# Altium PCB MCU_FOR_DOWNLOAD_V6_8_PCS.PcbDoc (part 3 of 4)
Units mil, origin at the board's own origin, x right, y up, seen from the top; angles counter-clockwise.
Board outline 4834.06 x 3482.15 mil, 4 copper layers (Top, GND1, GND2, Bottom), stack 35.4 mil thick; 280 components, 38 nets, 1144 pads, 944 vias.
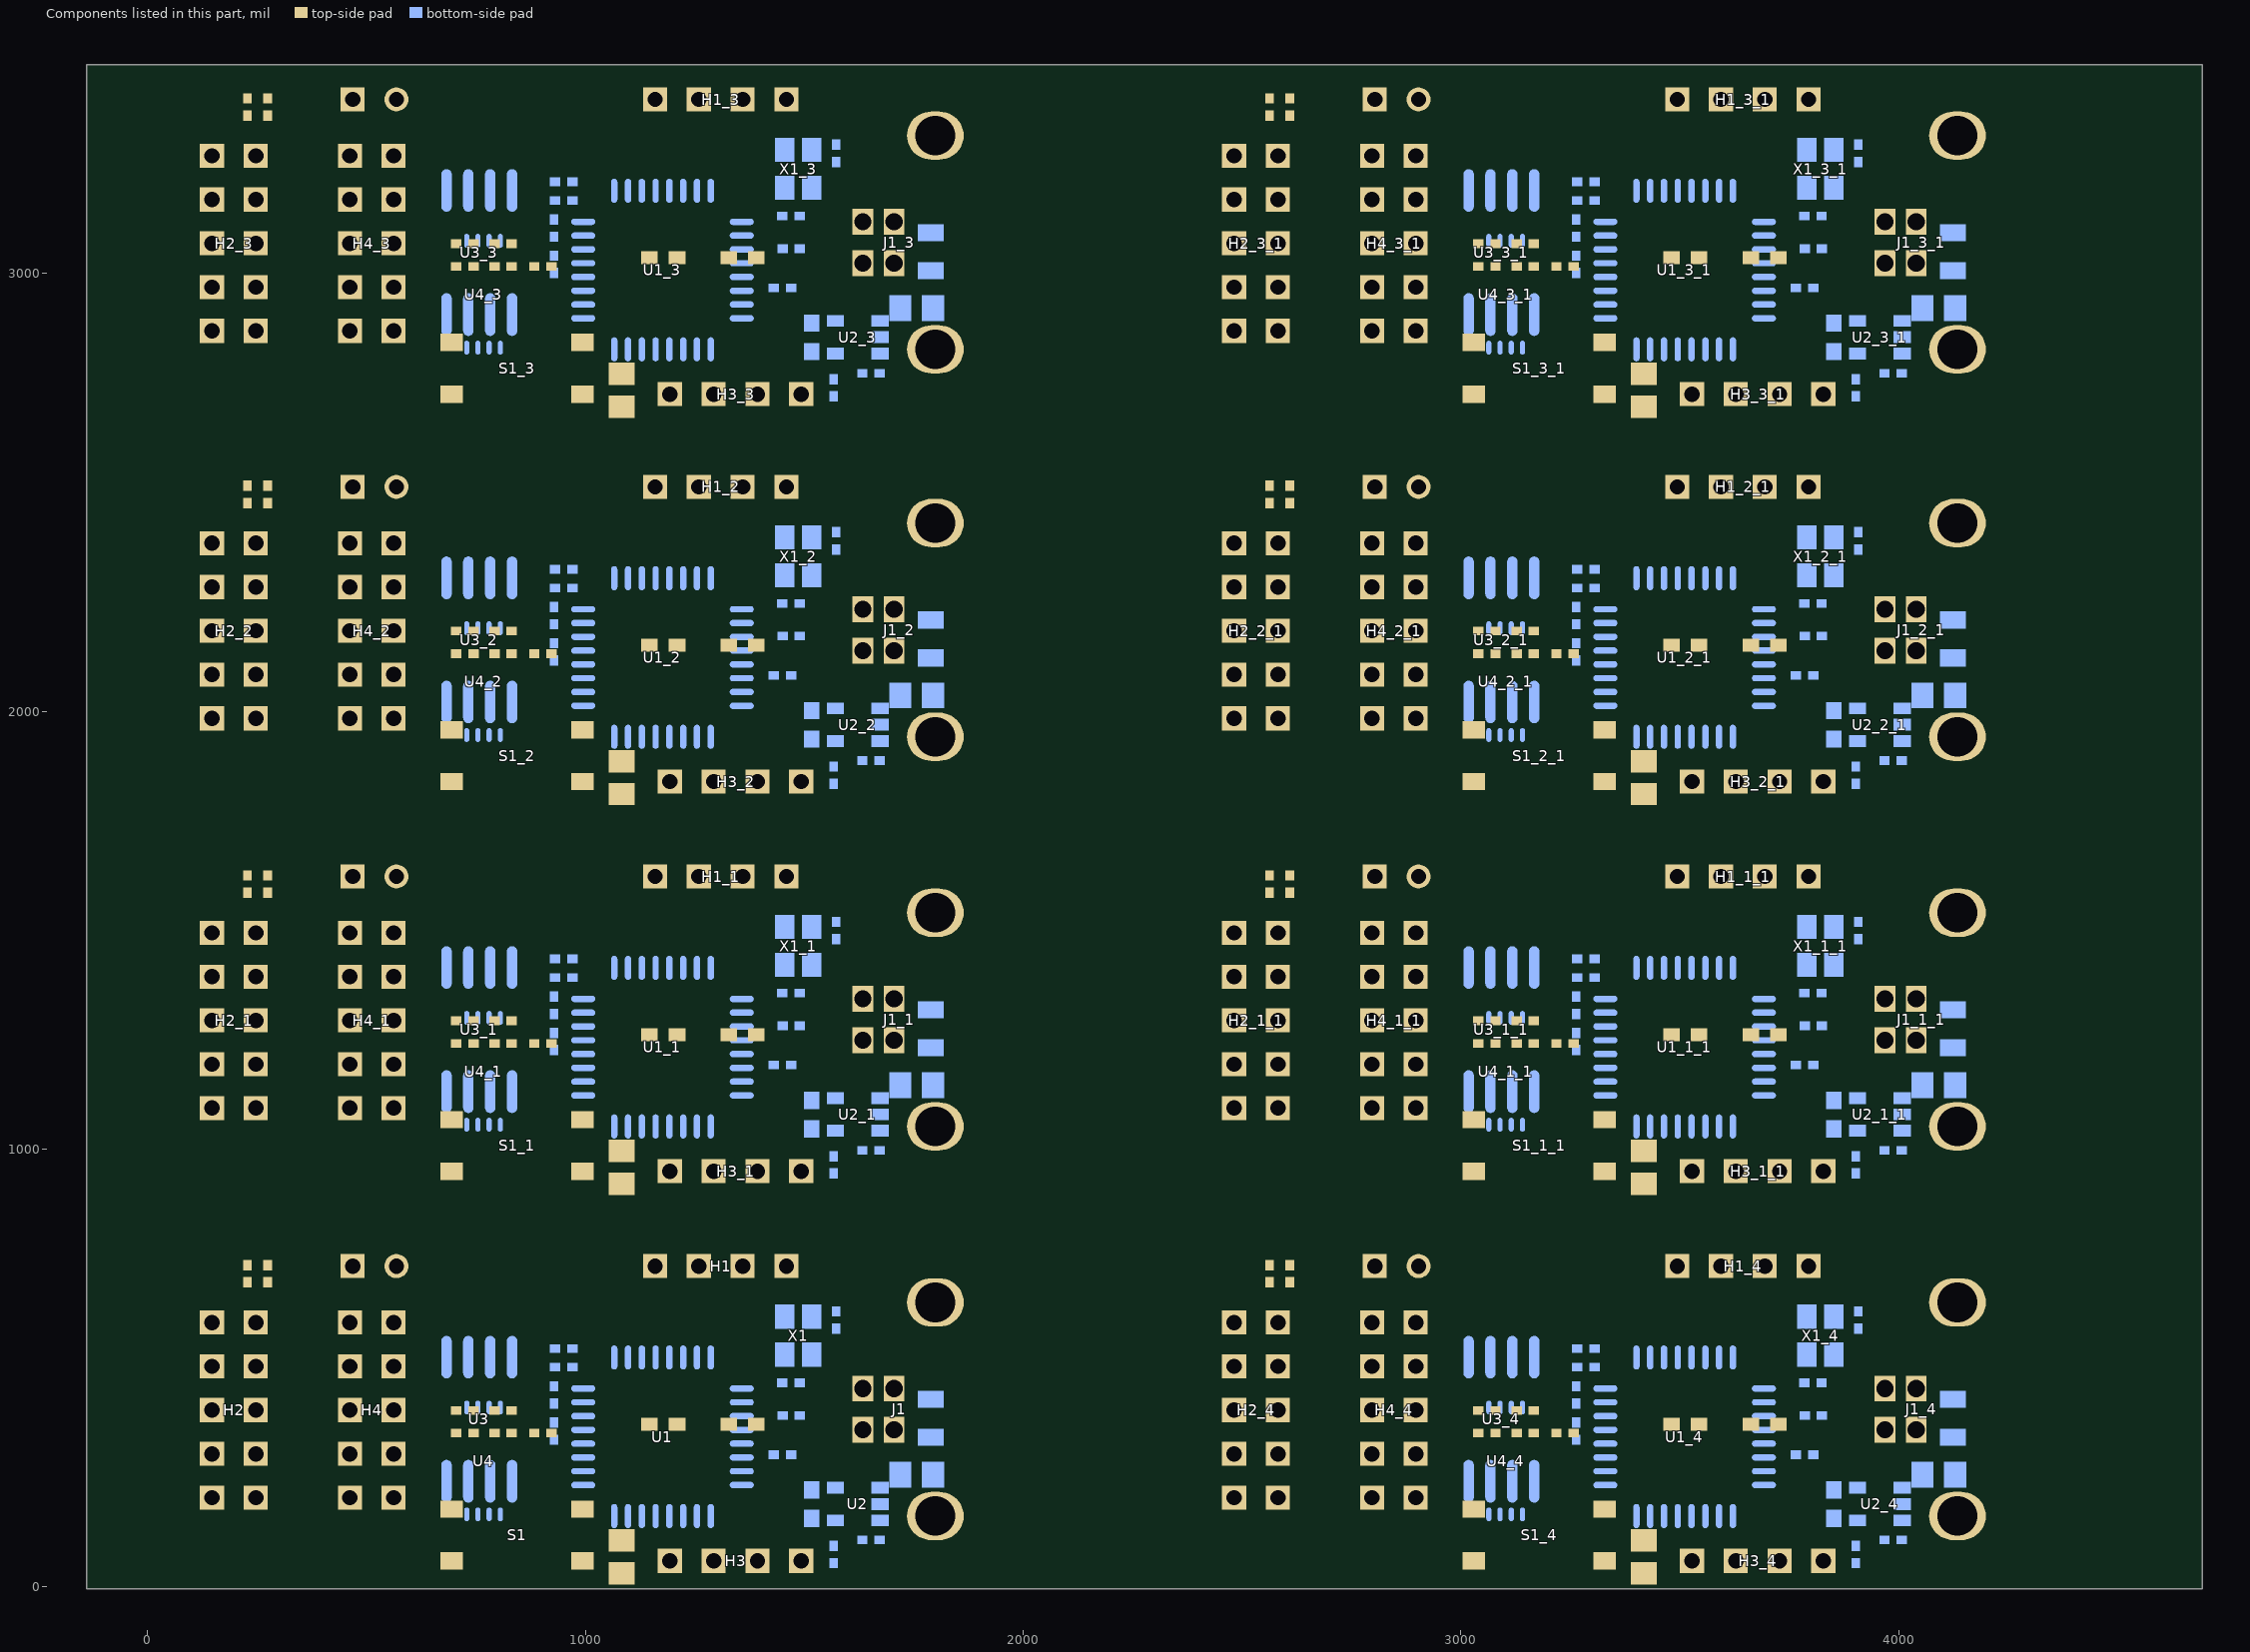
[diagram p3: the components of this part, seen from the top]

## Via types
v1: diameter 16/16/16/16 (per signal layer), hole 8, Top to Bottom, 936 vias
v2: diameter 55/55/55/55 (per signal layer), hole 37, Top to Bottom, 8 vias

## Nets (pads, with @x,y where several pads share a name; then routed paths per layer and width w, separated by ;. In a path a pad name is that pad's centre, name@x,y a point inside that pad or via, vN(x,y) a via of type N, cw(c..) or ccw(c..) an arc to the next point about the centre after c; other vN are vias at no path point) (continued)
copper on no net: (continued)
  Bottom w7.87: 146.85,1393.54 194.88,1441.57 413.78,1441.57 461.81,1393.54 508.27,1440 509.06,1440 509.84,1440.79 582.68,1440.79 601.57,1459.69 601.57,1497.09 637.4,1532.91 878.74,1532.91 966.14,1445.51 966.14,1434.09 966.14,1432.91 968.9,1432.91 970.08,1434.09 970.08,1391.58 970.08,1389.61 928.35,1347.87 ; 146.85,2283.54 194.88,2331.57 413.78,2331.57 461.81,2283.54 508.27,2330 509.06,2330 509.84,2330.79 582.68,2330.79 601.57,2349.69 601.57,2387.09 637.4,2422.91 878.74,2422.91 966.14,2335.51 966.14,2324.09 966.14,2322.91 968.9,2322.91 970.08,2324.09 970.08,2281.58 970.08,2279.61 928.35,2237.87 ; 146.85,3168.54 194.88,3216.57 413.78,3216.57 461.81,3168.54 508.27,3215 509.06,3215 509.84,3215.79 582.68,3215.79 601.57,3234.69 601.57,3272.09 637.4,3307.91 878.74,3307.91 966.14,3220.51 966.14,3209.09 966.14,3207.91 968.9,3207.91 970.08,3209.09 970.08,3166.58 970.08,3164.61 928.35,3122.87 ; 461.81,1193.54 511.42,1243.15 511.42,1243.94 598.82,1243.94 638.58,1283.7 638.58,1432.91 638.98,1433.31 638.98,1470.31 661.02,1492.36 753.9,1492.36 785.12,1461.14 785.12,1417.05 782.48,1414.41 782.48,1321.1 v1@782.48,1320.31 ; 461.81,2083.54 511.42,2133.15 511.42,2133.94 598.82,2133.94 638.58,2173.7 638.58,2322.91 638.98,2323.31 638.98,2360.31 661.02,2382.36 753.9,2382.36 785.12,2351.14 785.12,2307.05 782.48,2304.41 782.48,2211.1 v1@782.48,2210.31 ; 461.81,2968.54 511.42,3018.15 511.42,3018.94 598.82,3018.94 638.58,3058.7 638.58,3207.91 638.98,3208.31 638.98,3245.31 661.02,3267.36 753.9,3267.36 785.12,3236.14 785.12,3192.05 782.48,3189.41 782.48,3096.1 v1@782.48,3095.31 ; 463.55,1096.92 464.09,1096.92 465.75,1098.58 466.54,1098.58 507.56,1139.61 587.8,1139.61 728.74,1280.55 728.74,1299.45 728.74,1323.86 692.52,1360.08 v1@692.13,1360.47 ; 463.55,1986.92 464.09,1986.92 465.75,1988.58 466.54,1988.58 507.56,2029.61 587.8,2029.61 728.74,2170.55 728.74,2189.45 728.74,2213.86 692.52,2250.08 v1@692.13,2250.47 ; 463.55,2871.92 464.09,2871.92 465.75,2873.58 466.54,2873.58 507.56,2914.61 587.8,2914.61 728.74,3055.55 728.74,3074.45 728.74,3098.86 692.52,3135.08 v1@692.13,3135.47 ; 561.81,1193.54 575.2,1193.54 575.98,1192.76 658.27,1275.04 658.27,1461.26 673.23,1476.22 715.94,1476.22 732.48,1459.69 732.48,1414.41 733.86,1413.03 733.86,1370.71 754.33,1350.24 754.33,1321.1 v1(753.94,1321.1) 754.33,1320.71 754.33,1299.45 ; 561.81,1493.54 618.11,1549.84 929.53,1549.84 1044.49,1434.88 1044.49,1171.5 1026.77,1153.78 994.88,1153.78 994.09,1154.57 962.6,1154.57 835.83,1027.8 766.54,1027.8 754.33,1040 754.33,1055.35 754.33,1077.8 733.07,1099.06 733.07,1130.35 732.48,1130.94 ; 561.81,2083.54 575.2,2083.54 575.98,2082.76 658.27,2165.04 658.27,2351.26 673.23,2366.22 715.94,2366.22 732.48,2349.69 732.48,2304.41 733.86,2303.03 733.86,2260.71 754.33,2240.24 754.33,2211.1 v1(753.94,2211.1) 754.33,2210.71 754.33,2189.45 ; 561.81,2383.54 618.11,2439.84 929.53,2439.84 1044.49,2324.88 1044.49,2061.5 1026.77,2043.78 994.88,2043.78 994.09,2044.57 962.6,2044.57 835.83,1917.8 766.54,1917.8 754.33,1930 754.33,1945.35 754.33,1967.8 733.07,1989.06 733.07,2020.35 732.48,2020.94 ; 561.81,2968.54 575.2,2968.54 575.98,2967.76 658.27,3050.04 658.27,3236.26 673.23,3251.22 715.94,3251.22 732.48,3234.69 732.48,3189.41 733.86,3188.03 733.86,3145.71 754.33,3125.24 754.33,3096.1 v1(753.94,3096.1) 754.33,3095.71 754.33,3074.45 ; 561.81,3268.54 618.11,3324.84 929.53,3324.84 1044.49,3209.88 1044.49,2946.5 1026.77,2928.78 994.88,2928.78 994.09,2929.57 962.6,2929.57 835.83,2802.8 766.54,2802.8 754.33,2815 754.33,2830.35 754.33,2852.8 733.07,2874.06 733.07,2905.35 732.48,2905.94 ; 565.4,1100.1 569.82,1100.1 570.87,1099.06 677.97,1206.16 782.48,1206.16 782.48,1203.78 ; 565.4,1990.1 569.82,1990.1 570.87,1989.06 677.97,2096.16 782.48,2096.16 782.48,2093.78 ; 565.4,2875.1 569.82,2875.1 570.87,2874.06 677.97,2981.16 782.48,2981.16 782.48,2978.78 ; 682.48,1414.41 683.46,1413.43 683.46,1369.13 v1@692.13,1360.47 ; 682.48,2304.41 683.46,2303.43 683.46,2259.13 v1@692.13,2250.47 ; 682.48,3189.41 683.46,3188.43 683.46,3144.13 v1@692.13,3135.47 ; v1(692.91,1187.24) 692.91,1186.65 682.48,1176.22 ; v1(692.91,1360.47) v1@692.13,1360.47 ; v1(692.91,2077.24) 692.91,2076.65 682.48,2066.22 ; v1(692.91,2250.47) v1@692.13,2250.47 ; v1(692.91,2962.24) 692.91,2961.65 682.48,2951.22 ; v1(692.91,3135.47) v1@692.13,3135.47 ; 779.92,1055.35 779.92,1109.69 782.48,1112.24 782.48,1130.94 782.48,1203.78 ; 779.92,1299.45 782.48,1302.01 v1@782.48,1320.31 ; 779.92,1945.35 779.92,1999.69 782.48,2002.24 782.48,2020.94 782.48,2093.78 ; 779.92,2189.45 782.48,2192.01 v1@782.48,2210.31 ; 779.92,2830.35 779.92,2884.69 782.48,2887.24 782.48,2905.94 782.48,2978.78 ; 779.92,3074.45 782.48,3077.01 v1@782.48,3095.31 ; v1(783.46,1321.1) 782.68,1320.31 v1@782.48,1320.31 ; v1(783.46,2211.1) 782.68,2210.31 v1@782.48,2210.31 ; v1(783.46,3096.1) 782.68,3095.31 v1@782.48,3095.31 ; v1(791.34,1210.87) 784.25,1203.78 782.48,1203.78 ; v1(791.34,2100.87) 784.25,2093.78 782.48,2093.78 ; v1(791.34,2985.87) 784.25,2978.78 782.48,2978.78 ; 805.51,1055.35 805.51,1082.13 832.48,1109.09 832.48,1130.94 833.07,1131.54 833.07,1162.05 816.93,1178.19 816.93,1247.09 839.76,1269.92 v1(893.7,1269.92) 893.7,1360.47 v1(872.05,1382.13) ; 805.51,1945.35 805.51,1972.13 832.48,1999.09 832.48,2020.94 833.07,2021.54 833.07,2052.05 816.93,2068.19 816.93,2137.09 839.76,2159.92 v1(893.7,2159.92) 893.7,2250.47 v1(872.05,2272.13) ; 805.51,2830.35 805.51,2857.13 832.48,2884.09 832.48,2905.94 833.07,2906.54 833.07,2937.05 816.93,2953.19 816.93,3022.09 839.76,3044.92 v1(893.7,3044.92) 893.7,3135.47 v1(872.05,3157.13) ; v1(844.49,1224.65) 845.28,1224.65 884.65,1185.28 994.88,1185.28 ; v1(844.49,2114.65) 845.28,2114.65 884.65,2075.28 994.88,2075.28 ; v1(844.49,2999.65) 845.28,2999.65 884.65,2960.28 994.88,2960.28 ; 852.76,1414.41 853.94,1415.59 ; 852.76,2304.41 853.94,2305.59 ; 852.76,3189.41 853.94,3190.59 ; v1(910.63,1391.57) 911.02,1391.57 930.71,1391.57 ; v1(910.63,2281.57) 911.02,2281.57 930.71,2281.57 ; v1(910.63,3166.57) 911.02,3166.57 930.71,3166.57 ; 928.35,1225.83 948.82,1225.83 970.47,1247.48 994.09,1247.48 994.88,1248.27 ; 928.35,1265.2 948.03,1265.2 v1(948.82,1265.98) ; 928.35,1308.5 929.92,1308.5 964.17,1342.76 994.88,1342.76 ; 928.35,2115.83 948.82,2115.83 970.47,2137.48 994.09,2137.48 994.88,2138.27 ; 928.35,2155.2 948.03,2155.2 v1(948.82,2155.98) ; 928.35,2198.5 929.92,2198.5 964.17,2232.76 994.88,2232.76 ; 928.35,3000.83 948.82,3000.83 970.47,3022.48 994.09,3022.48 994.88,3023.27 ; 928.35,3040.2 948.03,3040.2 v1(948.82,3040.98) ; 928.35,3083.5 929.92,3083.5 964.17,3117.76 994.88,3117.76 ; v1(944.88,1037.64) 972.05,1037.64 1011.02,1076.61 1011.02,1083.7 ; v1(944.88,1069.13) 945.28,1069.53 945.28,1104.17 963.39,1122.28 994.88,1122.28 ; v1(944.88,1927.64) 972.05,1927.64 1011.02,1966.61 1011.02,1973.7 ; v1(944.88,1959.13) 945.28,1959.53 945.28,1994.17 963.39,2012.28 994.88,2012.28 ; v1(944.88,2812.64) 972.05,2812.64 1011.02,2851.61 1011.02,2858.7 ; v1(944.88,2844.13) 945.28,2844.53 945.28,2879.17 963.39,2897.28 994.88,2897.28 ; 1065.75,1051.42 1065.75,1075.83 v1(1074.41,1084.49) ; 1065.75,1413.62 1065.75,1449.45 1159.06,1542.76 1159.06,1622.28 ; 1065.75,1941.42 1065.75,1965.83 v1(1074.41,1974.49) ; 1065.75,2303.62 1065.75,2339.45 1159.06,2432.76 1159.06,2512.28 ; 1065.75,2826.42 1065.75,2850.83 v1(1074.41,2859.49) ; 1065.75,3188.62 1065.75,3224.45 1159.06,3317.76 1159.06,3397.28 ; v1(1074.8,1228.58) 1075.2,1228.19 1075.2,1147.87 ; v1(1074.8,2118.58) 1075.2,2118.19 1075.2,2037.87 ; v1(1074.8,3003.58) 1075.2,3003.19 1075.2,2922.87 ; v1(1096.46,1092.76) 1097.24,1091.97 1097.24,1051.42 ; v1(1096.46,1982.76) 1097.24,1981.97 1097.24,1941.42 ; v1(1096.46,2867.76) 1097.24,2866.97 1097.24,2826.42 ; 1097.24,1413.62 1097.24,1447.09 1259.06,1608.9 1259.06,1622.28 ; 1097.24,2303.62 1097.24,2337.09 1259.06,2498.9 1259.06,2512.28 ; 1097.24,3188.62 1097.24,3222.09 1259.06,3383.9 1259.06,3397.28 ; v1(1127.95,1094.72) 1128.74,1093.94 1128.74,1051.42 ; v1(1127.95,1984.72) 1128.74,1983.94 1128.74,1941.42 ; v1(1127.95,2869.72) 1128.74,2868.94 1128.74,2826.42 ; 1128.74,1413.62 1128.74,1447.48 1240.16,1558.9 1307.09,1558.9 1359.06,1610.87 1359.06,1622.28 ; 1128.74,2303.62 1128.74,2337.48 1240.16,2448.9 1307.09,2448.9 1359.06,2500.87 1359.06,2512.28 ; 1128.74,3188.62 1128.74,3222.48 1240.16,3333.9 1307.09,3333.9 1359.06,3385.87 1359.06,3397.28 ; v1(1149.61,1360.47) 1208.27,1360.47 1208.66,1360.08 1223.23,1374.65 1223.23,1413.62 ; v1(1149.61,2250.47) 1208.27,2250.47 1208.66,2250.08 1223.23,2264.65 1223.23,2303.62 ; v1(1149.61,3135.47) 1208.27,3135.47 1208.66,3135.08 1223.23,3149.65 1223.23,3188.62 ; v1(1159.45,1090.79) 1160.24,1090 1160.24,1051.42 ; v1(1159.45,1980.79) 1160.24,1980 1160.24,1941.42 ; v1(1159.45,2865.79) 1160.24,2865 1160.24,2826.42 ; 1160.24,1413.62 1160.24,1443.54 1254.33,1537.64 1377.56,1537.64 1450.79,1610.87 1459.06,1610.87 1459.45,1610.87 1459.45,1614.02 1459.06,1622.28 ; 1160.24,2303.62 1160.24,2333.54 1254.33,2427.64 1377.56,2427.64 1450.79,2500.87 1459.06,2500.87 1459.45,2500.87 1459.45,2504.02 1459.06,2512.28 ; 1160.24,3188.62 1160.24,3218.54 1254.33,3312.64 1377.56,3312.64 1450.79,3385.87 1459.06,3385.87 1459.45,3385.87 1459.45,3389.02 1459.06,3397.28 ; 1191.73,1051.42 1191.73,1091.18 1222.44,1121.89 v1(1222.44,1122.28) ; v1(1191.73,1378.98) 1191.73,1413.62 ; 1191.73,1941.42 1191.73,1981.18 1222.44,2011.89 v1(1222.44,2012.28) ; v1(1191.73,2268.98) 1191.73,2303.62 ; 1191.73,2826.42 1191.73,2866.18 1222.44,2896.89 v1(1222.44,2897.28) ; v1(1191.73,3153.98) 1191.73,3188.62 ; v1(1222.44,1088.82) 1223.23,1088.03 1223.23,1051.42 ; v1(1222.44,1978.82) 1223.23,1978.03 1223.23,1941.42 ; v1(1222.44,2863.82) 1223.23,2863.03 1223.23,2826.42 ; 1254.72,1051.42 1254.72,1012.05 1297.01,969.76 1297.01,949.26 1300.59,949.26 1292.91,949.06 ; 1254.72,1413.62 1254.72,1433.7 1281.5,1460.47 1473.62,1460.47 1512.99,1499.84 1512.99,1506.93 1512.99,1507.32 1516.22,1507.32 1516.61,1506.93 1543.31,1480.24 1543.31,1479.37 1572.44,1479.37 ; 1254.72,1941.42 1254.72,1902.05 1297.01,1859.76 1297.01,1839.26 1300.59,1839.26 1292.91,1839.06 ; 1254.72,2303.62 1254.72,2323.7 1281.5,2350.47 1473.62,2350.47 1512.99,2389.84 1512.99,2396.93 1512.99,2397.32 1516.22,2397.32 1516.61,2396.93 1543.31,2370.24 1543.31,2369.37 1572.44,2369.37 ; 1254.72,2826.42 1254.72,2787.05 1297.01,2744.76 1297.01,2724.26 1300.59,2724.26 1292.91,2724.06 ; 1254.72,3188.62 1254.72,3208.7 1281.5,3235.47 1473.62,3235.47 1512.99,3274.84 1512.99,3281.93 1512.99,3282.32 1516.22,3282.32 1516.61,3281.93 1543.31,3255.24 1543.31,3254.37 1572.44,3254.37 ; 1286.22,1051.42 1286.22,1013.62 1306.5,993.35 1359.06,993.35 1398.13,954.27 1400.79,951.61 1392.91,949.06 ; 1286.22,1413.62 1286.22,1434.09 1294.88,1442.76 1438.58,1442.76 1455.04,1426.3 1455.04,1420.31 1455.04,1414.33 1449.61,1408.9 1449.61,1355.75 ; 1286.22,1941.42 1286.22,1903.62 1306.5,1883.35 1359.06,1883.35 1398.13,1844.27 1400.79,1841.61 1392.91,1839.06 ; 1286.22,2303.62 1286.22,2324.09 1294.88,2332.76 1438.58,2332.76 1455.04,2316.3 1455.04,2310.31 1455.04,2304.33 1449.61,2298.9 1449.61,2245.75 ; 1286.22,2826.42 1286.22,2788.62 1306.5,2768.35 1359.06,2768.35 1398.13,2729.27 1400.79,2726.61 1392.91,2724.06 ; 1286.22,3188.62 1286.22,3209.09 1294.88,3217.76 1438.58,3217.76 1455.04,3201.3 1455.04,3195.31 1455.04,3189.33 1449.61,3183.9 1449.61,3130.75 ; v1(1309.06,1342.76) 1357.09,1342.76 ; v1(1309.06,2232.76) 1357.09,2232.76 ; v1(1309.06,3117.76) 1357.09,3117.76 ; v1(1311.02,1311.26) 1357.09,1311.26 ; v1(1311.02,2201.26) 1357.09,2201.26 ; v1(1311.02,3086.26) 1357.09,3086.26 ; v1(1322.83,1286.06) 1328.6,1280.3 1328.6,1280.01 1328.85,1279.76 1357.09,1279.76 1381.89,1279.76 v1(1395.67,1293.54) ; v1(1322.83,2176.06) 1328.6,2170.3 1328.6,2170.01 1328.85,2169.76 1357.09,2169.76 1381.89,2169.76 v1(1395.67,2183.54) ; v1(1322.83,3061.06) 1328.6,3055.3 1328.6,3055.01 1328.85,3054.76 1357.09,3054.76 1381.89,3054.76 v1(1395.67,3068.54) ; v1(1425.2,1281.73) 1450,1281.73 1450.39,1281.34 ; v1(1425.2,2171.73) 1450,2171.73 1450.39,2171.34 ; v1(1425.2,3056.73) 1450,3056.73 1450.39,3056.34 ; 1469.68,1191.58 1489.76,1191.58 v1(1490.16,1191.18) ; 1469.68,2081.58 1489.76,2081.58 v1(1490.16,2081.18) ; 1469.68,2966.58 1489.76,2966.58 v1(1490.16,2966.18) ; 1632.68,997.09 1619.29,1010.47 1617.72,1010.47 1617.72,1088.57 1646.88,1117.73 1647.02,1117.73 1647.24,1117.95 1673.23,1117.95 1674.02,1117.18 1673.23,1116.38 ; 1632.68,1887.09 1619.29,1900.47 1617.72,1900.47 1617.72,1978.57 1646.88,2007.73 1647.02,2007.73 1647.24,2007.95 1673.23,2007.95 1674.02,2007.18 1673.23,2006.38 ; 1632.68,2772.09 1619.29,2785.47 1617.72,2785.47 1617.72,2863.57 1646.88,2892.73 1647.02,2892.73 1647.24,2892.95 1673.23,2892.95 1674.02,2892.18 1673.23,2891.38 ; v1(1639.76,1078.98) 1673.23,1078.98 1690.94,1078.98 1691.73,1078.19 ; v1(1639.76,1968.98) 1673.23,1968.98 1690.94,1968.98 1691.73,1968.19 ; v1(1639.76,2853.98) 1673.23,2853.98 1690.94,2853.98 1691.73,2853.19 ; 1672.05,997.09 1673.23,998.27 1673.23,1041.57 v1(1702.76,1041.57) ; 1672.05,1887.09 1673.23,1888.27 1673.23,1931.57 v1(1702.76,1931.57) ; 1672.05,2772.09 1673.23,2773.27 1673.23,2816.57 v1(1702.76,2816.57) ; v1(1700.79,1069.13) 1691.73,1078.19 ; v1(1700.79,1959.13) 1691.73,1968.19 ; v1(1700.79,2844.13) 1691.73,2853.19 ; v1(1702.76,1088.82) 1692.13,1078.19 1691.73,1078.19 ; v1(1702.76,1978.82) 1692.13,1968.19 1691.73,1968.19 ; v1(1702.76,2863.82) 1692.13,2853.19 1691.73,2853.19 ; 2481.85,503.54 2529.88,551.57 2748.78,551.57 2796.81,503.54 2843.27,550 2844.06,550 2844.84,550.79 2917.68,550.79 2936.57,569.69 2936.57,607.09 2972.4,642.91 3213.74,642.91 3301.14,555.51 3301.14,544.09 3301.14,542.91 3303.9,542.91 3305.08,544.09 3305.08,501.58 3305.08,499.61 3263.35,457.87 ; 2481.85,1393.54 2529.88,1441.57 2748.78,1441.57 2796.81,1393.54 2843.27,1440 2844.06,1440 2844.84,1440.79 2917.68,1440.79 2936.57,1459.69 2936.57,1497.09 2972.4,1532.91 3213.74,1532.91 3301.14,1445.51 3301.14,1434.09 3301.14,1432.91 3303.9,1432.91 3305.08,1434.09 3305.08,1391.58 3305.08,1389.61 3263.35,1347.87 ; 2481.85,2283.54 2529.88,2331.57 2748.78,2331.57 2796.81,2283.54 2843.27,2330 2844.06,2330 2844.84,2330.79 2917.68,2330.79 2936.57,2349.69 2936.57,2387.09 2972.4,2422.91 3213.74,2422.91 3301.14,2335.51 3301.14,2324.09 3301.14,2322.91 3303.9,2322.91 3305.08,2324.09 3305.08,2281.58 3305.08,2279.61 3263.35,2237.87 ; 2481.85,3168.54 2529.88,3216.57 2748.78,3216.57 2796.81,3168.54 2843.27,3215 2844.06,3215 2844.84,3215.79 2917.68,3215.79 2936.57,3234.69 2936.57,3272.09 2972.4,3307.91 3213.74,3307.91 3301.14,3220.51 3301.14,3209.09 3301.14,3207.91 3303.9,3207.91 3305.08,3209.09 3305.08,3166.58 3305.08,3164.61 3263.35,3122.87 ; 2796.81,303.54 2846.42,353.15 2846.42,353.94 2933.82,353.94 2973.58,393.7 2973.58,542.91 2973.98,543.31 2973.98,580.31 2996.02,602.36 3088.9,602.36 3120.12,571.14 3120.12,527.05 3117.48,524.41 3117.48,431.1 v1@3117.48,430.31 ; 2796.81,1193.54 2846.42,1243.15 2846.42,1243.94 2933.82,1243.94 2973.58,1283.7 2973.58,1432.91 2973.98,1433.31 2973.98,1470.31 2996.02,1492.36 3088.9,1492.36 3120.12,1461.14 3120.12,1417.05 3117.48,1414.41 3117.48,1321.1 v1@3117.48,1320.31 ; 2796.81,2083.54 2846.42,2133.15 2846.42,2133.94 2933.82,2133.94 2973.58,2173.7 2973.58,2322.91 2973.98,2323.31 2973.98,2360.31 2996.02,2382.36 3088.9,2382.36 3120.12,2351.14 3120.12,2307.05 3117.48,2304.41 3117.48,2211.1 v1@3117.48,2210.31 ; 2796.81,2968.54 2846.42,3018.15 2846.42,3018.94 2933.82,3018.94 2973.58,3058.7 2973.58,3207.91 2973.98,3208.31 2973.98,3245.31 2996.02,3267.36 3088.9,3267.36 3120.12,3236.14 3120.12,3192.05 3117.48,3189.41 3117.48,3096.1 v1@3117.48,3095.31 ; 2798.55,206.92 2799.09,206.92 2800.75,208.58 2801.54,208.58 2842.56,249.61 2922.8,249.61 3063.74,390.55 3063.74,409.45 3063.74,433.86 3027.52,470.08 v1@3027.13,470.47 ; 2798.55,1096.92 2799.09,1096.92 2800.75,1098.58 2801.54,1098.58 2842.56,1139.61 2922.8,1139.61 3063.74,1280.55 3063.74,1299.45 3063.74,1323.86 3027.52,1360.08 v1@3027.13,1360.47 ; 2798.55,1986.92 2799.09,1986.92 2800.75,1988.58 2801.54,1988.58 2842.56,2029.61 2922.8,2029.61 3063.74,2170.55 3063.74,2189.45 3063.74,2213.86 3027.52,2250.08 v1@3027.13,2250.47 ; 2798.55,2871.92 2799.09,2871.92 2800.75,2873.58 2801.54,2873.58 2842.56,2914.61 2922.8,2914.61 3063.74,3055.55 3063.74,3074.45 3063.74,3098.86 3027.52,3135.08 v1@3027.13,3135.47 ; 2896.81,303.54 2910.2,303.54 2910.98,302.76 2993.27,385.04 2993.27,571.26 3008.23,586.22 3050.94,586.22 3067.48,569.69 3067.48,524.41 3068.86,523.03 3068.86,480.71 3089.33,460.24 3089.33,431.1 v1(3088.94,431.1) 3089.33,430.71 3089.33,409.45 ; 2896.81,603.54 2953.11,659.84 3264.53,659.84 3379.49,544.88 3379.49,281.5 3361.77,263.78 3329.88,263.78 3329.09,264.57 3297.6,264.57 3170.83,137.8 3101.54,137.8 3089.33,150 3089.33,165.35 3089.33,187.8 3068.07,209.06 3068.07,240.35 3067.48,240.94 ; 2896.81,1193.54 2910.2,1193.54 2910.98,1192.76 2993.27,1275.04 2993.27,1461.26 3008.23,1476.22 3050.94,1476.22 3067.48,1459.69 3067.48,1414.41 3068.86,1413.03 3068.86,1370.71 3089.33,1350.24 3089.33,1321.1 v1(3088.94,1321.1) 3089.33,1320.71 3089.33,1299.45 ; 2896.81,1493.54 2953.11,1549.84 3264.53,1549.84 3379.49,1434.88 3379.49,1171.5 3361.77,1153.78 3329.88,1153.78 3329.09,1154.57 3297.6,1154.57 3170.83,1027.8 3101.54,1027.8 3089.33,1040 3089.33,1055.35 3089.33,1077.8 3068.07,1099.06 3068.07,1130.35 3067.48,1130.94 ; 2896.81,2083.54 2910.2,2083.54 2910.98,2082.76 2993.27,2165.04 2993.27,2351.26 3008.23,2366.22 3050.94,2366.22 3067.48,2349.69 3067.48,2304.41 3068.86,2303.03 3068.86,2260.71 3089.33,2240.24 3089.33,2211.1 v1(3088.94,2211.1) 3089.33,2210.71 3089.33,2189.45 ; 2896.81,2383.54 2953.11,2439.84 3264.53,2439.84 3379.49,2324.88 3379.49,2061.5 3361.77,2043.78 3329.88,2043.78 3329.09,2044.57 3297.6,2044.57 3170.83,1917.8 3101.54,1917.8 3089.33,1930 3089.33,1945.35 3089.33,1967.8 3068.07,1989.06 3068.07,2020.35 3067.48,2020.94 ; 2896.81,2968.54 2910.2,2968.54 2910.98,2967.76 2993.27,3050.04 2993.27,3236.26 3008.23,3251.22 3050.94,3251.22 3067.48,3234.69 3067.48,3189.41 3068.86,3188.03 3068.86,3145.71 3089.33,3125.24 3089.33,3096.1 v1(3088.94,3096.1) 3089.33,3095.71 3089.33,3074.45 ; 2896.81,3268.54 2953.11,3324.84 3264.53,3324.84 3379.49,3209.88 3379.49,2946.5 3361.77,2928.78 3329.88,2928.78 3329.09,2929.57 3297.6,2929.57 3170.83,2802.8 3101.54,2802.8 3089.33,2815 3089.33,2830.35 3089.33,2852.8 3068.07,2874.06 3068.07,2905.35 3067.48,2905.94 ; 2900.4,210.1 2904.82,210.1 2905.87,209.06 3012.97,316.16 3117.48,316.16 3117.48,313.78 ; 2900.4,1100.1 2904.82,1100.1 2905.87,1099.06 3012.97,1206.16 3117.48,1206.16 3117.48,1203.78 ; 2900.4,1990.1 2904.82,1990.1 2905.87,1989.06 3012.97,2096.16 3117.48,2096.16 3117.48,2093.78 ; 2900.4,2875.1 2904.82,2875.1 2905.87,2874.06 3012.97,2981.16 3117.48,2981.16 3117.48,2978.78 ; 3017.48,524.41 3018.46,523.43 3018.46,479.13 v1@3027.13,470.47 ; 3017.48,1414.41 3018.46,1413.43 3018.46,1369.13 v1@3027.13,1360.47 ; 3017.48,2304.41 3018.46,2303.43 3018.46,2259.13 v1@3027.13,2250.47 ; 3017.48,3189.41 3018.46,3188.43 3018.46,3144.13 v1@3027.13,3135.47 ; v1(3027.91,297.24) 3027.91,296.65 3017.48,286.22 ; v1(3027.91,470.47) v1@3027.13,470.47 ; v1(3027.91,1187.24) 3027.91,1186.65 3017.48,1176.22 ; v1(3027.91,1360.47) v1@3027.13,1360.47 ; v1(3027.91,2077.24) 3027.91,2076.65 3017.48,2066.22 ; v1(3027.91,2250.47) v1@3027.13,2250.47 ; v1(3027.91,2962.24) 3027.91,2961.65 3017.48,2951.22 ; v1(3027.91,3135.47) v1@3027.13,3135.47 ; 3114.92,165.35 3114.92,219.69 3117.48,222.24 3117.48,240.94 3117.48,313.78 ; 3114.92,409.45 3117.48,412.01 v1@3117.48,430.31 ; 3114.92,1055.35 3114.92,1109.69 3117.48,1112.24 3117.48,1130.94 3117.48,1203.78 ; 3114.92,1299.45 3117.48,1302.01 v1@3117.48,1320.31 ; 3114.92,1945.35 3114.92,1999.69 3117.48,2002.24 3117.48,2020.94 3117.48,2093.78 ; 3114.92,2189.45 3117.48,2192.01 v1@3117.48,2210.31 ; 3114.92,2830.35 3114.92,2884.69 3117.48,2887.24 3117.48,2905.94 3117.48,2978.78 ; 3114.92,3074.45 3117.48,3077.01 v1@3117.48,3095.31 ; v1(3118.46,431.1) 3117.68,430.31 v1@3117.48,430.31 ; v1(3118.46,1321.1) 3117.68,1320.31 v1@3117.48,1320.31 ; v1(3118.46,2211.1) 3117.68,2210.31 v1@3117.48,2210.31 ; v1(3118.46,3096.1) 3117.68,3095.31 v1@3117.48,3095.31 ; v1(3126.34,320.87) 3119.25,313.78 3117.48,313.78 ; v1(3126.34,1210.87) 3119.25,1203.78 3117.48,1203.78 ; v1(3126.34,2100.87) 3119.25,2093.78 3117.48,2093.78 ; v1(3126.34,2985.87) 3119.25,2978.78 3117.48,2978.78 ; 3140.51,165.35 3140.51,192.13 3167.48,219.09 3167.48,240.94 3168.07,241.54 3168.07,272.05 3151.93,288.19 3151.93,357.09 3174.76,379.92 v1(3228.7,379.92) 3228.7,470.47 v1(3207.05,492.13) ; 3140.51,1055.35 3140.51,1082.13 3167.48,1109.09 3167.48,1130.94 3168.07,1131.54 3168.07,1162.05 3151.93,1178.19 3151.93,1247.09 3174.76,1269.92 v1(3228.7,1269.92) 3228.7,1360.47 v1(3207.05,1382.13) ; 3140.51,1945.35 3140.51,1972.13 3167.48,1999.09 3167.48,2020.94 3168.07,2021.54 3168.07,2052.05 3151.93,2068.19 3151.93,2137.09 3174.76,2159.92 v1(3228.7,2159.92) 3228.7,2250.47 v1(3207.05,2272.13) ; 3140.51,2830.35 3140.51,2857.13 3167.48,2884.09 3167.48,2905.94 3168.07,2906.54 3168.07,2937.05 3151.93,2953.19 3151.93,3022.09 3174.76,3044.92 v1(3228.7,3044.92) 3228.7,3135.47 v1(3207.05,3157.13) ; v1(3179.49,334.65) 3180.28,334.65 3219.65,295.28 3329.88,295.28 ; v1(3179.49,1224.65) 3180.28,1224.65 3219.65,1185.28 3329.88,1185.28 ; v1(3179.49,2114.65) 3180.28,2114.65 3219.65,2075.28 3329.88,2075.28 ; v1(3179.49,2999.65) 3180.28,2999.65 3219.65,2960.28 3329.88,2960.28 ; 3187.76,524.41 3188.94,525.59 ; 3187.76,1414.41 3188.94,1415.59 ; 3187.76,2304.41 3188.94,2305.59 ; 3187.76,3189.41 3188.94,3190.59 ; v1(3245.63,501.57) 3246.02,501.57 3265.71,501.57 ; v1(3245.63,1391.57) 3246.02,1391.57 3265.71,1391.57 ; v1(3245.63,2281.57) 3246.02,2281.57 3265.71,2281.57 ; v1(3245.63,3166.57) 3246.02,3166.57 3265.71,3166.57 ; 3263.35,335.83 3283.82,335.83 3305.47,357.48 3329.09,357.48 3329.88,358.27 ; 3263.35,375.2 3283.03,375.2 v1(3283.82,375.98) ; 3263.35,418.5 3264.92,418.5 3299.17,452.76 3329.88,452.76 ; 3263.35,1225.83 3283.82,1225.83 3305.47,1247.48 3329.09,1247.48 3329.88,1248.27 ; 3263.35,1265.2 3283.03,1265.2 v1(3283.82,1265.98) ; 3263.35,1308.5 3264.92,1308.5 3299.17,1342.76 3329.88,1342.76 ; 3263.35,2115.83 3283.82,2115.83 3305.47,2137.48 3329.09,2137.48 3329.88,2138.27 ; 3263.35,2155.2 3283.03,2155.2 v1(3283.82,2155.98) ; 3263.35,2198.5 3264.92,2198.5 3299.17,2232.76 3329.88,2232.76 ; 3263.35,3000.83 3283.82,3000.83 3305.47,3022.48 3329.09,3022.48 3329.88,3023.27 ; 3263.35,3040.2 3283.03,3040.2 v1(3283.82,3040.98) ; 3263.35,3083.5 3264.92,3083.5 3299.17,3117.76 3329.88,3117.76 ; v1(3279.88,147.64) 3307.05,147.64 3346.02,186.61 3346.02,193.7 ; v1(3279.88,179.13) 3280.28,179.53 3280.28,214.17 3298.39,232.28 3329.88,232.28 ; v1(3279.88,1037.64) 3307.05,1037.64 3346.02,1076.61 3346.02,1083.7 ; v1(3279.88,1069.13) 3280.28,1069.53 3280.28,1104.17 3298.39,1122.28 3329.88,1122.28 ; v1(3279.88,1927.64) 3307.05,1927.64 3346.02,1966.61 3346.02,1973.7 ; v1(3279.88,1959.13) 3280.28,1959.53 3280.28,1994.17 3298.39,2012.28 3329.88,2012.28 ; v1(3279.88,2812.64) 3307.05,2812.64 3346.02,2851.61 3346.02,2858.7 ; v1(3279.88,2844.13) 3280.28,2844.53 3280.28,2879.17 3298.39,2897.28 3329.88,2897.28 ; 3400.75,161.42 3400.75,185.83 v1(3409.41,194.49) ; 3400.75,523.62 3400.75,559.45 3494.06,652.76 3494.06,732.28 ; 3400.75,1051.42 3400.75,1075.83 v1(3409.41,1084.49) ; 3400.75,1413.62 3400.75,1449.45 3494.06,1542.76 3494.06,1622.28 ; 3400.75,1941.42 3400.75,1965.83 v1(3409.41,1974.49) ; 3400.75,2303.62 3400.75,2339.45 3494.06,2432.76 3494.06,2512.28 ; 3400.75,2826.42 3400.75,2850.83 v1(3409.41,2859.49) ; 3400.75,3188.62 3400.75,3224.45 3494.06,3317.76 3494.06,3397.28 ; v1(3409.8,338.58) 3410.2,338.19 3410.2,257.87 ; v1(3409.8,1228.58) 3410.2,1228.19 3410.2,1147.87 ; v1(3409.8,2118.58) 3410.2,2118.19 3410.2,2037.87 ; v1(3409.8,3003.58) 3410.2,3003.19 3410.2,2922.87 ; v1(3431.46,202.76) 3432.24,201.97 3432.24,161.42 ; v1(3431.46,1092.76) 3432.24,1091.97 3432.24,1051.42 ; v1(3431.46,1982.76) 3432.24,1981.97 3432.24,1941.42 ; v1(3431.46,2867.76) 3432.24,2866.97 3432.24,2826.42 ; 3432.24,523.62 3432.24,557.09 3594.06,718.9 3594.06,732.28 ; 3432.24,1413.62 3432.24,1447.09 3594.06,1608.9 3594.06,1622.28 ; 3432.24,2303.62 3432.24,2337.09 3594.06,2498.9 3594.06,2512.28 ; 3432.24,3188.62 3432.24,3222.09 3594.06,3383.9 3594.06,3397.28 ; v1(3462.95,204.72) 3463.74,203.94 3463.74,161.42 ; v1(3462.95,1094.72) 3463.74,1093.94 3463.74,1051.42 ; v1(3462.95,1984.72) 3463.74,1983.94 3463.74,1941.42 ; v1(3462.95,2869.72) 3463.74,2868.94 3463.74,2826.42 ; 3463.74,523.62 3463.74,557.48 3575.16,668.9 3642.09,668.9 3694.06,720.87 3694.06,732.28 ; 3463.74,1413.62 3463.74,1447.48 3575.16,1558.9 3642.09,1558.9 3694.06,1610.87 3694.06,1622.28 ; 3463.74,2303.62 3463.74,2337.48 3575.16,2448.9 3642.09,2448.9 3694.06,2500.87 3694.06,2512.28 ; 3463.74,3188.62 3463.74,3222.48 3575.16,3333.9 3642.09,3333.9 3694.06,3385.87 3694.06,3397.28 ; v1(3484.61,470.47) 3543.27,470.47 3543.66,470.08 3558.23,484.65 3558.23,523.62 ; v1(3484.61,1360.47) 3543.27,1360.47 3543.66,1360.08 3558.23,1374.65 3558.23,1413.62 ; v1(3484.61,2250.47) 3543.27,2250.47 3543.66,2250.08 3558.23,2264.65 3558.23,2303.62 ; v1(3484.61,3135.47) 3543.27,3135.47 3543.66,3135.08 3558.23,3149.65 3558.23,3188.62 ; v1(3494.45,200.79) 3495.24,200 3495.24,161.42 ; v1(3494.45,1090.79) 3495.24,1090 3495.24,1051.42 ; v1(3494.45,1980.79) 3495.24,1980 3495.24,1941.42 ; v1(3494.45,2865.79) 3495.24,2865 3495.24,2826.42 ; 3495.24,523.62 3495.24,553.54 3589.33,647.64 3712.56,647.64 3785.79,720.87 3794.06,720.87 3794.45,720.87 3794.45,724.02 3794.06,732.28 ; 3495.24,1413.62 3495.24,1443.54 3589.33,1537.64 3712.56,1537.64 3785.79,1610.87 3794.06,1610.87 3794.45,1610.87 3794.45,1614.02 3794.06,1622.28 ; 3495.24,2303.62 3495.24,2333.54 3589.33,2427.64 3712.56,2427.64 3785.79,2500.87 3794.06,2500.87 3794.45,2500.87 3794.45,2504.02 3794.06,2512.28 ; 3495.24,3188.62 3495.24,3218.54 3589.33,3312.64 3712.56,3312.64 3785.79,3385.87 3794.06,3385.87 3794.45,3385.87 3794.45,3389.02 3794.06,3397.28 ; 3526.73,161.42 3526.73,201.18 3557.44,231.89 v1(3557.44,232.28) ; v1(3526.73,488.98) 3526.73,523.62 ; 3526.73,1051.42 3526.73,1091.18 3557.44,1121.89 v1(3557.44,1122.28) ; v1(3526.73,1378.98) 3526.73,1413.62 ; 3526.73,1941.42 3526.73,1981.18 3557.44,2011.89 v1(3557.44,2012.28) ; v1(3526.73,2268.98) 3526.73,2303.62 ; 3526.73,2826.42 3526.73,2866.18 3557.44,2896.89 v1(3557.44,2897.28) ; v1(3526.73,3153.98) 3526.73,3188.62 ; v1(3557.44,198.82) 3558.23,198.03 3558.23,161.42 ; v1(3557.44,1088.82) 3558.23,1088.03 3558.23,1051.42 ; v1(3557.44,1978.82) 3558.23,1978.03 3558.23,1941.42 ; v1(3557.44,2863.82) 3558.23,2863.03 3558.23,2826.42 ; 3589.72,161.42 3589.72,122.05 3632.01,79.76 3632.01,59.26 3635.59,59.26 3627.91,59.06 ; 3589.72,523.62 3589.72,543.7 3616.5,570.47 3808.62,570.47 3847.99,609.84 3847.99,616.93 3847.99,617.32 3851.22,617.32 3851.61,616.93 3878.31,590.24 3878.31,589.37 3907.44,589.37 ; 3589.72,1051.42 3589.72,1012.05 3632.01,969.76 3632.01,949.26 3635.59,949.26 3627.91,949.06 ; 3589.72,1413.62 3589.72,1433.7 3616.5,1460.47 3808.62,1460.47 3847.99,1499.84 3847.99,1506.93 3847.99,1507.32 3851.22,1507.32 3851.61,1506.93 3878.31,1480.24 3878.31,1479.37 3907.44,1479.37 ; 3589.72,1941.42 3589.72,1902.05 3632.01,1859.76 3632.01,1839.26 3635.59,1839.26 3627.91,1839.06 ; 3589.72,2303.62 3589.72,2323.7 3616.5,2350.47 3808.62,2350.47 3847.99,2389.84 3847.99,2396.93 3847.99,2397.32 3851.22,2397.32 3851.61,2396.93 3878.31,2370.24 3878.31,2369.37 3907.44,2369.37 ; 3589.72,2826.42 3589.72,2787.05 3632.01,2744.76 3632.01,2724.26 3635.59,2724.26 3627.91,2724.06 ; 3589.72,3188.62 3589.72,3208.7 3616.5,3235.47 3808.62,3235.47 3847.99,3274.84 3847.99,3281.93 3847.99,3282.32 3851.22,3282.32 3851.61,3281.93 3878.31,3255.24 3878.31,3254.37 3907.44,3254.37 ; 3621.22,161.42 3621.22,123.62 3641.5,103.35 3694.06,103.35 3733.13,64.27 3735.79,61.61 3727.91,59.06 ; 3621.22,523.62 3621.22,544.09 3629.88,552.76 3773.58,552.76 3790.04,536.3 3790.04,530.31 3790.04,524.33 3784.61,518.9 3784.61,465.75 ; 3621.22,1051.42 3621.22,1013.62 3641.5,993.35 3694.06,993.35 3733.13,954.27 3735.79,951.61 3727.91,949.06 ; 3621.22,1413.62 3621.22,1434.09 3629.88,1442.76 3773.58,1442.76 3790.04,1426.3 3790.04,1420.31 3790.04,1414.33 3784.61,1408.9 3784.61,1355.75 ; 3621.22,1941.42 3621.22,1903.62 3641.5,1883.35 3694.06,1883.35 3733.13,1844.27 3735.79,1841.61 3727.91,1839.06 ; 3621.22,2303.62 3621.22,2324.09 3629.88,2332.76 3773.58,2332.76 3790.04,2316.3 3790.04,2310.31 3790.04,2304.33 3784.61,2298.9 3784.61,2245.75 ; 3621.22,2826.42 3621.22,2788.62 3641.5,2768.35 3694.06,2768.35 3733.13,2729.27 3735.79,2726.61 3727.91,2724.06 ; 3621.22,3188.62 3621.22,3209.09 3629.88,3217.76 3773.58,3217.76 3790.04,3201.3 3790.04,3195.31 3790.04,3189.33 3784.61,3183.9 3784.61,3130.75 ; v1(3644.06,452.76) 3692.09,452.76 ; v1(3644.06,1342.76) 3692.09,1342.76 ; v1(3644.06,2232.76) 3692.09,2232.76 ; v1(3644.06,3117.76) 3692.09,3117.76 ; v1(3646.02,421.26) 3692.09,421.26 ; v1(3646.02,1311.26) 3692.09,1311.26 ; v1(3646.02,2201.26) 3692.09,2201.26 ; v1(3646.02,3086.26) 3692.09,3086.26 ; v1(3657.83,396.06) 3663.6,390.3 3663.6,390.01 3663.85,389.76 3692.09,389.76 3716.89,389.76 v1(3730.67,403.54) ; v1(3657.83,1286.06) 3663.6,1280.3 3663.6,1280.01 3663.85,1279.76 3692.09,1279.76 3716.89,1279.76 v1(3730.67,1293.54) ; v1(3657.83,2176.06) 3663.6,2170.3 3663.6,2170.01 3663.85,2169.76 3692.09,2169.76 3716.89,2169.76 v1(3730.67,2183.54) ; v1(3657.83,3061.06) 3663.6,3055.3 3663.6,3055.01 3663.85,3054.76 3692.09,3054.76 3716.89,3054.76 v1(3730.67,3068.54) ; v1(3760.2,391.73) 3785,391.73 3785.39,391.34 ; v1(3760.2,1281.73) 3785,1281.73 3785.39,1281.34 ; v1(3760.2,2171.73) 3785,2171.73 3785.39,2171.34 ; v1(3760.2,3056.73) 3785,3056.73 3785.39,3056.34 ; 3804.68,301.58 3824.76,301.58 v1(3825.16,301.18) ; 3804.68,1191.58 3824.76,1191.58 v1(3825.16,1191.18) ; 3804.68,2081.58 3824.76,2081.58 v1(3825.16,2081.18) ; 3804.68,2966.58 3824.76,2966.58 v1(3825.16,2966.18) ; 3967.68,107.09 3954.29,120.47 3952.72,120.47 3952.72,198.57 3981.88,227.73 3982.02,227.73 3982.24,227.95 4008.23,227.95 4009.02,227.18 4008.23,226.38 ; 3967.68,997.09 3954.29,1010.47 3952.72,1010.47 3952.72,1088.57 3981.88,1117.73 3982.02,1117.73 3982.24,1117.95 4008.23,1117.95 4009.02,1117.18 4008.23,1116.38 ; 3967.68,1887.09 3954.29,1900.47 3952.72,1900.47 3952.72,1978.57 3981.88,2007.73 3982.02,2007.73 3982.24,2007.95 4008.23,2007.95 4009.02,2007.18 4008.23,2006.38 ; 3967.68,2772.09 3954.29,2785.47 3952.72,2785.47 3952.72,2863.57 3981.88,2892.73 3982.02,2892.73 3982.24,2892.95 4008.23,2892.95 4009.02,2892.18 4008.23,2891.38 ; v1(3974.76,188.98) 4008.23,188.98 4025.94,188.98 4026.73,188.19 ; v1(3974.76,1078.98) 4008.23,1078.98 4025.94,1078.98 4026.73,1078.19 ; v1(3974.76,1968.98) 4008.23,1968.98 4025.94,1968.98 4026.73,1968.19 ; v1(3974.76,2853.98) 4008.23,2853.98 4025.94,2853.98 4026.73,2853.19 ; 4007.05,107.09 4008.23,108.27 4008.23,151.57 v1(4037.76,151.57) ; 4007.05,997.09 4008.23,998.27 4008.23,1041.57 v1(4037.76,1041.57) ; 4007.05,1887.09 4008.23,1888.27 4008.23,1931.57 v1(4037.76,1931.57) ; 4007.05,2772.09 4008.23,2773.27 4008.23,2816.57 v1(4037.76,2816.57) ; v1(4035.79,179.13) 4026.73,188.19 ; v1(4035.79,1069.13) 4026.73,1078.19 ; v1(4035.79,1959.13) 4026.73,1968.19 ; v1(4035.79,2844.13) 4026.73,2853.19 ; v1(4037.76,198.82) 4027.13,188.19 4026.73,188.19 ; v1(4037.76,1088.82) 4027.13,1078.19 4026.73,1078.19 ; v1(4037.76,1978.82) 4027.13,1968.19 4026.73,1968.19 ; v1(4037.76,2863.82) 4027.13,2853.19 4026.73,2853.19 ; 682.48,1176.22 686.32,1131.84 682.48,1128 682.48,1130.94 682.48,1176.22 ; 682.48,2066.22 686.32,2021.84 682.48,2018 682.48,2020.94 682.48,2066.22 ; 682.48,2951.22 686.32,2906.84 682.48,2903 682.48,2905.94 682.48,2951.22 ; 3017.48,286.22 3021.32,241.84 3017.48,238 3017.48,240.94 3017.48,286.22 ; 3017.48,1176.22 3017.48,1130.94 3017.48,1128 3021.32,1131.84 3017.48,1176.22 ; 3017.48,2066.22 3017.48,2020.94 3017.48,2018 3021.32,2021.84 3017.48,2066.22 ; 3017.48,2951.22 3017.48,2905.94 3017.48,2903 3021.32,2906.84 3017.48,2951.22
  Bottom w9.84: 1357.09,1153.78 1376.38,1153.78 ; 1357.09,2043.78 1376.38,2043.78 ; 1357.09,2928.78 1376.38,2928.78 ; 3692.09,263.78 3711.38,263.78 ; 3692.09,1153.78 3711.38,1153.78 ; 3692.09,2043.78 3711.38,2043.78 ; 3692.09,2928.78 3711.38,2928.78
  Bottom w11.81: 461.81,1093.54 463.55,1096.92 ; 461.81,1983.54 463.55,1986.92 ; 461.81,2868.54 463.55,2871.92 ; 561.81,1093.54 565.4,1097.13 565.4,1100.1 ; 561.81,1393.54 575.72,1393.54 620.08,1437.9 620.08,1485.28 644.88,1510.08 798.43,1510.08 832.48,1476.02 832.48,1414.41 ; 561.81,1983.54 565.4,1987.13 565.4,1990.1 ; 561.81,2283.54 575.72,2283.54 620.08,2327.9 620.08,2375.28 644.88,2400.08 798.43,2400.08 832.48,2366.02 832.48,2304.41 ; 561.81,2868.54 565.4,2872.13 565.4,2875.1 ; 561.81,3168.54 575.72,3168.54 620.08,3212.9 620.08,3260.28 644.88,3285.08 798.43,3285.08 832.48,3251.02 832.48,3189.41 ; 805.51,1299.45 805.51,1345.91 832.68,1373.07 832.68,1414.21 832.48,1414.41 ; 805.51,2189.45 805.51,2235.91 832.68,2263.07 832.68,2304.21 832.48,2304.41 ; 805.51,3074.45 805.51,3120.91 832.68,3148.07 832.68,3189.21 832.48,3189.41 ; 852.76,1414.41 832.48,1414.41 ; 852.76,2304.41 832.48,2304.41 ; 852.76,3189.41 832.48,3189.41 ; 853.94,1415.59 872.44,1434.09 930.71,1434.09 ; 853.94,2305.59 872.44,2324.09 930.71,2324.09 ; 853.94,3190.59 872.44,3209.09 930.71,3209.09 ; 1192.91,949.06 1190.76,949.27 1190.63,949.27 1161.32,978.58 1087.4,978.58 1045.28,1020.71 1044.88,1020.71 1044.88,1085.28 1144.09,1184.49 1151.97,1184.49 1152.76,1185.28 1357.09,1185.28 ; 1192.91,1839.06 1190.76,1839.27 1190.63,1839.27 1161.32,1868.58 1087.4,1868.58 1045.28,1910.71 1044.88,1910.71 1044.88,1975.28 1144.09,2074.49 1151.97,2074.49 1152.76,2075.28 1357.09,2075.28 ; 1192.91,2724.06 1190.76,2724.27 1190.63,2724.27 1161.32,2753.58 1087.4,2753.58 1045.28,2795.71 1044.88,2795.71 1044.88,2860.28 1144.09,2959.49 1151.97,2959.49 1152.76,2960.28 1357.09,2960.28 ; 2796.81,203.54 2798.55,206.92 ; 2796.81,1093.54 2798.55,1096.92 ; 2796.81,1983.54 2798.55,1986.92 ; 2796.81,2868.54 2798.55,2871.92 ; 2896.81,203.54 2900.4,207.13 2900.4,210.1 ; 2896.81,503.54 2910.72,503.54 2955.08,547.9 2955.08,595.28 2979.88,620.08 3133.43,620.08 3167.48,586.02 3167.48,524.41 ; 2896.81,1093.54 2900.4,1097.13 2900.4,1100.1 ; 2896.81,1393.54 2910.72,1393.54 2955.08,1437.9 2955.08,1485.28 2979.88,1510.08 3133.43,1510.08 3167.48,1476.02 3167.48,1414.41 ; 2896.81,1983.54 2900.4,1987.13 2900.4,1990.1 ; 2896.81,2283.54 2910.72,2283.54 2955.08,2327.9 2955.08,2375.28 2979.88,2400.08 3133.43,2400.08 3167.48,2366.02 3167.48,2304.41 ; 2896.81,2868.54 2900.4,2872.13 2900.4,2875.1 ; 2896.81,3168.54 2910.72,3168.54 2955.08,3212.9 2955.08,3260.28 2979.88,3285.08 3133.43,3285.08 3167.48,3251.02 3167.48,3189.41 ; 3140.51,409.45 3140.51,455.91 3167.68,483.07 3167.68,524.21 3167.48,524.41 ; 3140.51,1299.45 3140.51,1345.91 3167.68,1373.07 3167.68,1414.21 3167.48,1414.41 ; 3140.51,2189.45 3140.51,2235.91 3167.68,2263.07 3167.68,2304.21 3167.48,2304.41 ; 3140.51,3074.45 3140.51,3120.91 3167.68,3148.07 3167.68,3189.21 3167.48,3189.41 ; 3187.76,524.41 3167.48,524.41 ; 3187.76,1414.41 3167.48,1414.41 ; 3187.76,2304.41 3167.48,2304.41 ; 3187.76,3189.41 3167.48,3189.41 ; 3188.94,525.59 3207.44,544.09 3265.71,544.09 ; 3188.94,1415.59 3207.44,1434.09 3265.71,1434.09 ; 3188.94,2305.59 3207.44,2324.09 3265.71,2324.09 ; 3188.94,3190.59 3207.44,3209.09 3265.71,3209.09 ; 3527.91,59.06 3525.76,59.27 3525.63,59.27 3496.32,88.58 3422.4,88.58 3380.28,130.71 3379.88,130.71 3379.88,195.28 3479.09,294.49 3486.97,294.49 3487.76,295.28 3692.09,295.28 ; 3527.91,949.06 3525.76,949.27 3525.63,949.27 3496.32,978.58 3422.4,978.58 3380.28,1020.71 3379.88,1020.71 3379.88,1085.28 3479.09,1184.49 3486.97,1184.49 3487.76,1185.28 3692.09,1185.28 ; 3527.91,1839.06 3525.76,1839.27 3525.63,1839.27 3496.32,1868.58 3422.4,1868.58 3380.28,1910.71 3379.88,1910.71 3379.88,1975.28 3479.09,2074.49 3486.97,2074.49 3487.76,2075.28 3692.09,2075.28 ; 3527.91,2724.06 3525.76,2724.27 3525.63,2724.27 3496.32,2753.58 3422.4,2753.58 3380.28,2795.71 3379.88,2795.71 3379.88,2860.28 3479.09,2959.49 3486.97,2959.49 3487.76,2960.28 3692.09,2960.28
  Bottom w13.78: 1357.09,1216.77 1609.45,1216.77 1633.46,1240.79 1633.86,1241.18 1633.86,1248.27 ; 1357.09,1248.27 1534.25,1248.27 1551.18,1265.2 1580.71,1294.72 1668.9,1294.72 1704.72,1258.9 1704.72,1248.27 ; 1357.09,2106.77 1609.45,2106.77 1633.46,2130.79 1633.86,2131.18 1633.86,2138.27 ; 1357.09,2138.27 1534.25,2138.27 1551.18,2155.2 1580.71,2184.72 1668.9,2184.72 1704.72,2148.9 1704.72,2138.27 ; 1357.09,2991.77 1609.45,2991.77 1633.46,3015.79 1633.86,3016.18 1633.86,3023.27 ; 1357.09,3023.27 1534.25,3023.27 1551.18,3040.2 1580.71,3069.72 1668.9,3069.72 1704.72,3033.9 1704.72,3023.27 ; v1(1397.64,1185.28) 1424.02,1185.28 1430.32,1191.57 ; v1(1397.64,2075.28) 1424.02,2075.28 1430.32,2081.57 ; v1(1397.64,2960.28) 1424.02,2960.28 1430.32,2966.57 ; 3692.09,326.77 3944.45,326.77 3968.46,350.79 3968.86,351.18 3968.86,358.27 ; 3692.09,358.27 3869.25,358.27 3886.18,375.2 3915.71,404.72 4003.9,404.72 4039.72,368.9 4039.72,358.27 ; 3692.09,1216.77 3944.45,1216.77 3968.46,1240.79 3968.86,1241.18 3968.86,1248.27 ; 3692.09,1248.27 3869.25,1248.27 3886.18,1265.2 3915.71,1294.72 4003.9,1294.72 4039.72,1258.9 4039.72,1248.27 ; 3692.09,2106.77 3944.45,2106.77 3968.46,2130.79 3968.86,2131.18 3968.86,2138.27 ; 3692.09,2138.27 3869.25,2138.27 3886.18,2155.2 3915.71,2184.72 4003.9,2184.72 4039.72,2148.9 4039.72,2138.27 ; 3692.09,2991.77 3944.45,2991.77 3968.46,3015.79 3968.86,3016.18 3968.86,3023.27 ; 3692.09,3023.27 3869.25,3023.27 3886.18,3040.2 3915.71,3069.72 4003.9,3069.72 4039.72,3033.9 4039.72,3023.27 ; v1(3732.64,295.28) 3759.02,295.28 3765.32,301.57 ; v1(3732.64,1185.28) 3759.02,1185.28 3765.32,1191.57 ; v1(3732.64,2075.28) 3759.02,2075.28 3765.32,2081.57 ; v1(3732.64,2960.28) 3759.02,2960.28 3765.32,2966.57
  Bottom w15.75: 1011.02,1083.7 1075.2,1147.87 ; 1011.02,1973.7 1075.2,2037.87 ; 1011.02,2858.7 1075.2,2922.87 ; 1357.09,1122.28 1370.87,1122.28 1389.37,1140.79 1376.38,1153.78 ; 1357.09,2012.28 1370.87,2012.28 1389.37,2030.79 1376.38,2043.78 ; 1357.09,2897.28 1370.87,2897.28 1389.37,2915.79 1376.38,2928.78 ; 3346.02,193.7 3410.2,257.87 ; 3346.02,1083.7 3410.2,1147.87 ; 3346.02,1973.7 3410.2,2037.87 ; 3346.02,2858.7 3410.2,2922.87 ; 3692.09,232.28 3705.87,232.28 3724.37,250.79 3711.38,263.78 ; 3692.09,1122.28 3705.87,1122.28 3724.37,1140.79 3711.38,1153.78 ; 3692.09,2012.28 3705.87,2012.28 3724.37,2030.79 3711.38,2043.78 ; 3692.09,2897.28 3705.87,2897.28 3724.37,2915.79 3711.38,2928.78
  Bottom w19.68: 1389.37,1140.79 1391.14,1142.56 1412.8,1142.56 1430.31,1160.08 1692.05,1160.08 1718.9,1146.07 1719.21,1145.91 ; 1389.37,2030.79 1391.14,2032.56 1412.8,2032.56 1430.31,2050.08 1692.05,2050.08 1718.9,2036.07 1719.21,2035.91 ; 1389.37,2915.79 1391.14,2917.56 1412.8,2917.56 1430.31,2935.08 1692.05,2935.08 1718.9,2921.07 1719.21,2920.91 ; 1516.93,1046.08 1522.66,1046.08 1527.17,1041.57 1566.54,1041.57 ; 1516.93,1936.08 1522.66,1936.08 1527.17,1931.57 1566.54,1931.57 ; 1516.93,2821.08 1522.66,2821.08 1527.17,2816.57 1566.54,2816.57 ; 1566.54,983.31 1566.54,1041.57 ; 1566.54,1873.31 1566.54,1931.57 ; 1566.54,2758.31 1566.54,2816.57 ; 1570.87,1041.57 1566.54,1041.57 ; 1570.87,1931.57 1566.54,1931.57 ; 1570.87,2816.57 1566.54,2816.57 ; 3724.37,250.79 3726.14,252.56 3747.8,252.56 3765.31,270.08 4027.05,270.08 4053.9,256.07 4054.21,255.91 ; 3724.37,1140.79 3726.14,1142.56 3747.8,1142.56 3765.31,1160.08 4027.05,1160.08 4053.9,1146.07 4054.21,1145.91 ; 3724.37,2030.79 3726.14,2032.56 3747.8,2032.56 3765.31,2050.08 4027.05,2050.08 4053.9,2036.07 4054.21,2035.91 ; 3724.37,2915.79 3726.14,2917.56 3747.8,2917.56 3765.31,2935.08 4027.05,2935.08 4053.9,2921.07 4054.21,2920.91 ; 3851.93,156.08 3857.66,156.08 3862.17,151.57 3901.54,151.57 ; 3851.93,1046.08 3857.66,1046.08 3862.17,1041.57 3901.54,1041.57 ; 3851.93,1936.08 3857.66,1936.08 3862.17,1931.57 3901.54,1931.57 ; 3851.93,2821.08 3857.66,2821.08 3862.17,2816.57 3901.54,2816.57 ; 3901.54,93.31 3901.54,151.57 ; 3901.54,983.31 3901.54,1041.57 ; 3901.54,1873.31 3901.54,1931.57 ; 3901.54,2758.31 3901.54,2816.57 ; 3905.87,151.57 3901.54,151.57 ; 3905.87,1041.57 3901.54,1041.57 ; 3905.87,1931.57 3901.54,1931.57 ; 3905.87,2816.57 3901.54,2816.57
  Bottom w23.62: 246.85,1393.54 277.95,1362.44 279.92,1362.44 298.82,1343.54 511.81,1343.54 561.81,1393.54 ; 246.85,2283.54 277.95,2252.44 279.92,2252.44 298.82,2233.54 511.81,2233.54 561.81,2283.54 ; 246.85,3168.54 277.95,3137.44 279.92,3137.44 298.82,3118.54 511.81,3118.54 561.81,3168.54 ; 1357.09,1185.28 v1(1397.64,1185.28) ; 1357.09,2075.28 v1(1397.64,2075.28) ; 1357.09,2960.28 v1(1397.64,2960.28) ; 1489.76,1281.34 1516.14,1281.34 v1(1519.69,1277.8) ; 1489.76,2171.34 1516.14,2171.34 v1(1519.69,2167.8) ; 1489.76,3056.34 1516.14,3056.34 v1(1519.69,3052.8) ; 2581.85,503.54 2612.95,472.44 2614.92,472.44 2633.82,453.54 2846.81,453.54 2896.81,503.54 ; 2581.85,1393.54 2612.95,1362.44 2614.92,1362.44 2633.82,1343.54 2846.81,1343.54 2896.81,1393.54 ; 2581.85,2283.54 2612.95,2252.44 2614.92,2252.44 2633.82,2233.54 2846.81,2233.54 2896.81,2283.54 ; 2581.85,3168.54 2612.95,3137.44 2614.92,3137.44 2633.82,3118.54 2846.81,3118.54 2896.81,3168.54 ; 3692.09,295.28 v1(3732.64,295.28) ; 3692.09,1185.28 v1(3732.64,1185.28) ; 3692.09,2075.28 v1(3732.64,2075.28) ; 3692.09,2960.28 v1(3732.64,2960.28) ; 3824.76,391.34 3851.14,391.34 v1(3854.69,387.8) ; 3824.76,1281.34 3851.14,1281.34 v1(3854.69,1277.8) ; 3824.76,2171.34 3851.14,2171.34 v1(3854.69,2167.8) ; 3824.76,3056.34 3851.14,3056.34 v1(3854.69,3052.8)
  Bottom w27.56: 1674.02,1117.18 1688.98,1132.52 1712.99,1132.52 ; 1674.02,2007.18 1688.98,2022.52 1712.99,2022.52 ; 1674.02,2892.18 1688.98,2907.52 1712.99,2907.52 ; 4009.02,227.18 4023.98,242.52 4047.99,242.52 ; 4009.02,1117.18 4023.98,1132.52 4047.99,1132.52 ; 4009.02,2007.18 4023.98,2022.52 4047.99,2022.52 ; 4009.02,2892.18 4023.98,2907.52 4047.99,2907.52
  Bottom w31.5: v2(1348.03,1056.54) 1400.29,1055.86 1455.51,1111.08 1516.93,1111.08 1565.57,1111.08 1570.87,1116.38 ; v2(1348.03,1946.54) 1400.29,1945.86 1455.51,2001.08 1516.93,2001.08 1565.57,2001.08 1570.87,2006.38 ; v2(1348.03,2831.54) 1400.29,2830.86 1455.51,2886.08 1516.93,2886.08 1565.57,2886.08 1570.87,2891.38 ; 1712.99,1132.52 1718.82,1132.52 1718.9,1135.19 ; 1712.99,2022.52 1718.82,2022.52 1718.9,2025.19 ; 1712.99,2907.52 1718.82,2907.52 1718.9,2910.19 ; 1788.98,1231.34 1718.9,1161.26 1718.9,1146.07 1718.9,1145.91 1718.9,1135.19 ; 1788.98,2121.34 1718.9,2051.26 1718.9,2036.07 1718.9,2035.91 1718.9,2025.19 ; 1788.98,3006.34 1718.9,2936.26 1718.9,2921.07 1718.9,2920.91 1718.9,2910.19 ; v2(3683.03,166.54) 3735.29,165.86 3790.51,221.08 3851.93,221.08 3900.57,221.08 3905.87,226.38 ; v2(3683.03,1056.54) 3735.29,1055.86 3790.51,1111.08 3851.93,1111.08 3900.57,1111.08 3905.87,1116.38 ; v2(3683.03,1946.54) 3735.29,1945.86 3790.51,2001.08 3851.93,2001.08 3900.57,2001.08 3905.87,2006.38 ; v2(3683.03,2831.54) 3735.29,2830.86 3790.51,2886.08 3851.93,2886.08 3900.57,2886.08 3905.87,2891.38 ; 4047.99,242.52 4053.82,242.52 4053.9,245.19 ; 4047.99,1132.52 4053.82,1132.52 4053.9,1135.19 ; 4047.99,2022.52 4053.82,2022.52 4053.9,2025.19 ; 4047.99,2907.52 4053.82,2907.52 4053.9,2910.19 ; 4123.98,341.34 4053.9,271.26 4053.9,256.07 4053.9,255.91 4053.9,245.19 ; 4123.98,1231.34 4053.9,1161.26 4053.9,1146.07 4053.9,1145.91 4053.9,1135.19 ; 4123.98,2121.34 4053.9,2051.26 4053.9,2036.07 4053.9,2035.91 4053.9,2025.19 ; 4123.98,3006.34 4053.9,2936.26 4053.9,2921.07 4053.9,2920.91 4053.9,2910.19 ; 1718.9,1135.19 1719.21,1145.91 1718.9,1133.23 1718.9,1135.19 ; 1718.9,2025.19 1719.21,2035.91 1718.9,2023.23 1718.9,2025.19 ; 1718.9,2910.19 1719.21,2920.91 1718.9,2908.23 1718.9,2910.19 ; 4053.9,245.19 4054.21,255.91 4053.9,243.23 4053.9,245.19 ; 4053.9,1135.19 4053.9,1133.23 4054.21,1145.91 4053.9,1135.19 ; 4053.9,2025.19 4053.9,2023.23 4054.21,2035.91 4053.9,2025.19 ; 4053.9,2910.19 4053.9,2908.23 4054.21,2920.91 4053.9,2910.19
  Bottom w39.37: 1633.86,1342.76 1629.14,1344.78 1628.99,1344.93 1628.99,1398.12 1648.43,1417.56 1744.09,1417.56 1788.98,1372.68 1788.98,1317.95 ; 1633.86,2232.76 1629.14,2234.78 1628.99,2234.93 1628.99,2288.12 1648.43,2307.56 1744.09,2307.56 1788.98,2262.68 1788.98,2207.95 ; 1633.86,3117.76 1629.14,3119.78 1628.99,3119.93 1628.99,3173.12 1648.43,3192.56 1744.09,3192.56 1788.98,3147.68 1788.98,3092.95 ; 3968.86,452.76 3964.14,454.78 3963.99,454.93 3963.99,508.12 3983.43,527.56 4079.09,527.56 4123.98,482.68 4123.98,427.95 ; 3968.86,1342.76 3964.14,1344.78 3963.99,1344.93 3963.99,1398.12 3983.43,1417.56 4079.09,1417.56 4123.98,1372.68 4123.98,1317.95 ; 3968.86,2232.76 3964.14,2234.78 3963.99,2234.93 3963.99,2288.12 3983.43,2307.56 4079.09,2307.56 4123.98,2262.68 4123.98,2207.95 ; 3968.86,3117.76 3964.14,3119.78 3963.99,3119.93 3963.99,3173.12 3983.43,3192.56 4079.09,3192.56 4123.98,3147.68 4123.98,3092.95